# Altium PCB Charger.PcbDoc
Units mil, origin at the board's own origin, x right, y up, seen from the top; angles counter-clockwise.
Board outline 3709 x 2654 mil, 4 copper layers (Top Layer, Internal Plane 1, Internal Plane 2, Bottom Layer), stack 30.634 mil thick; 90 components, 52 nets, 266 pads, 126 vias.
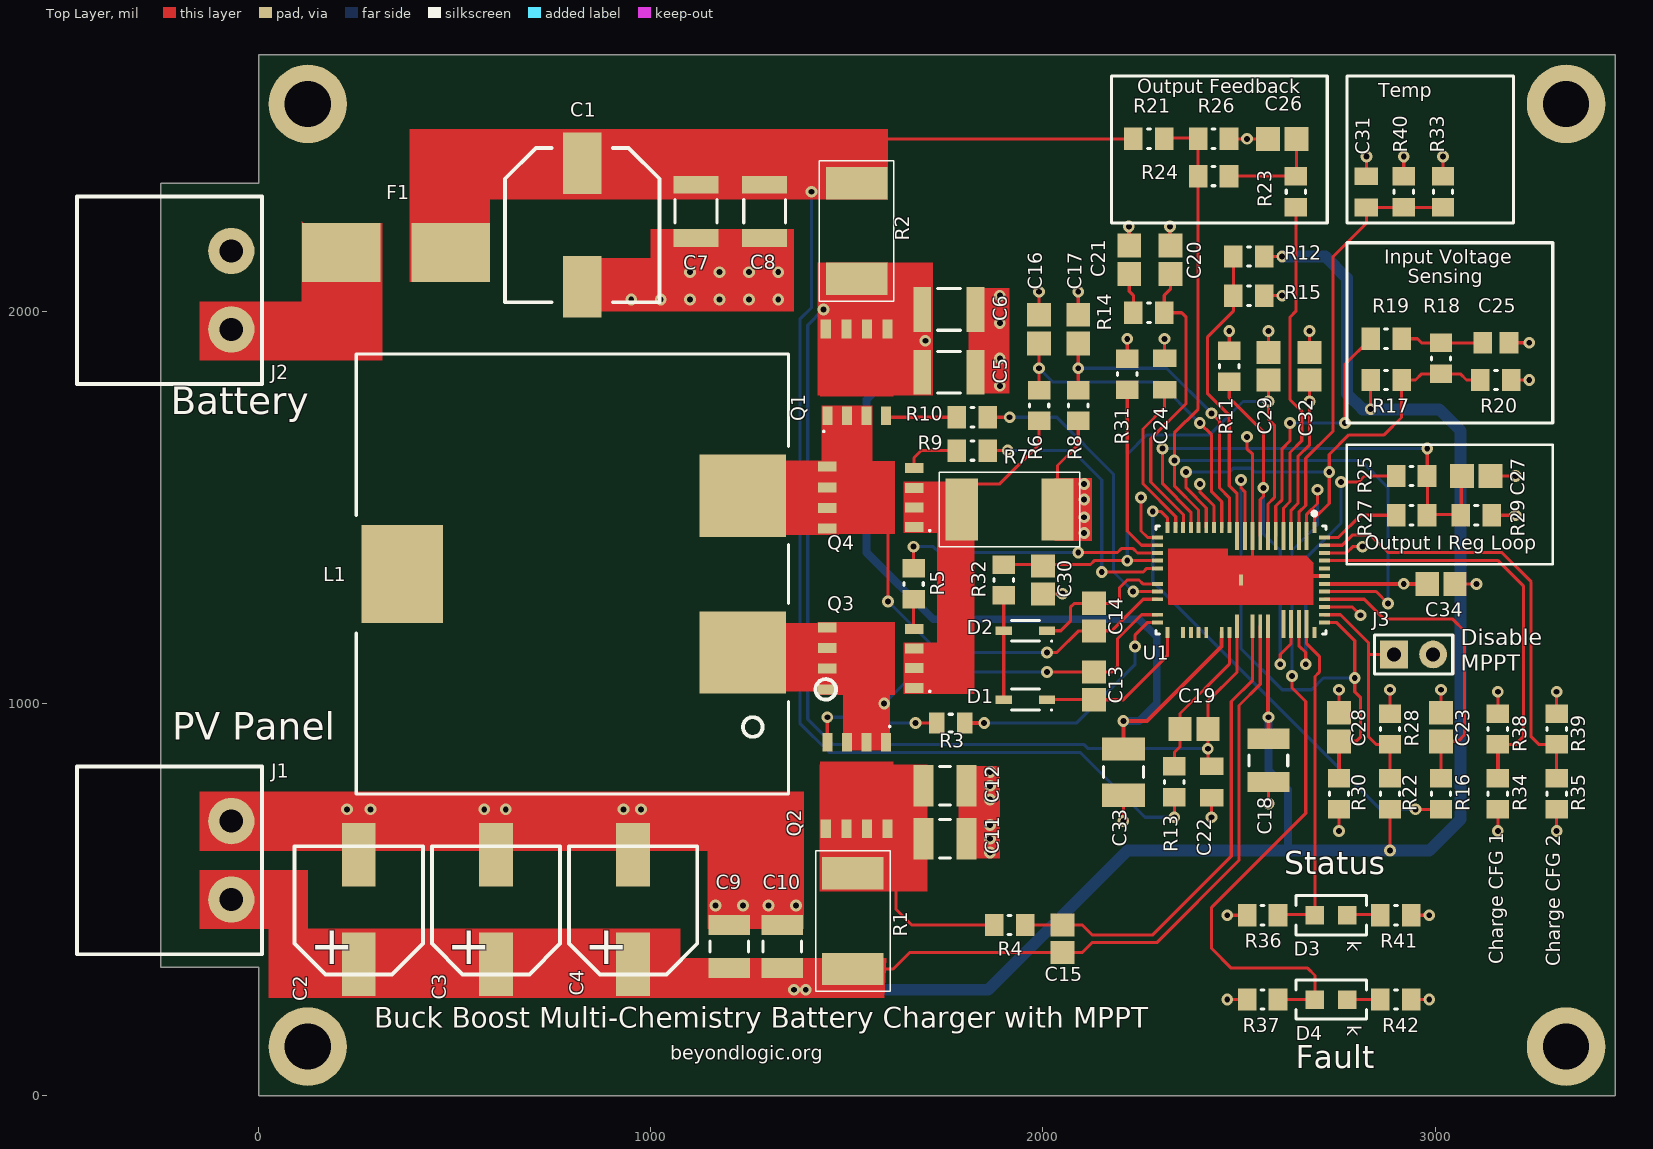
[diagram p0: Top Layer view]
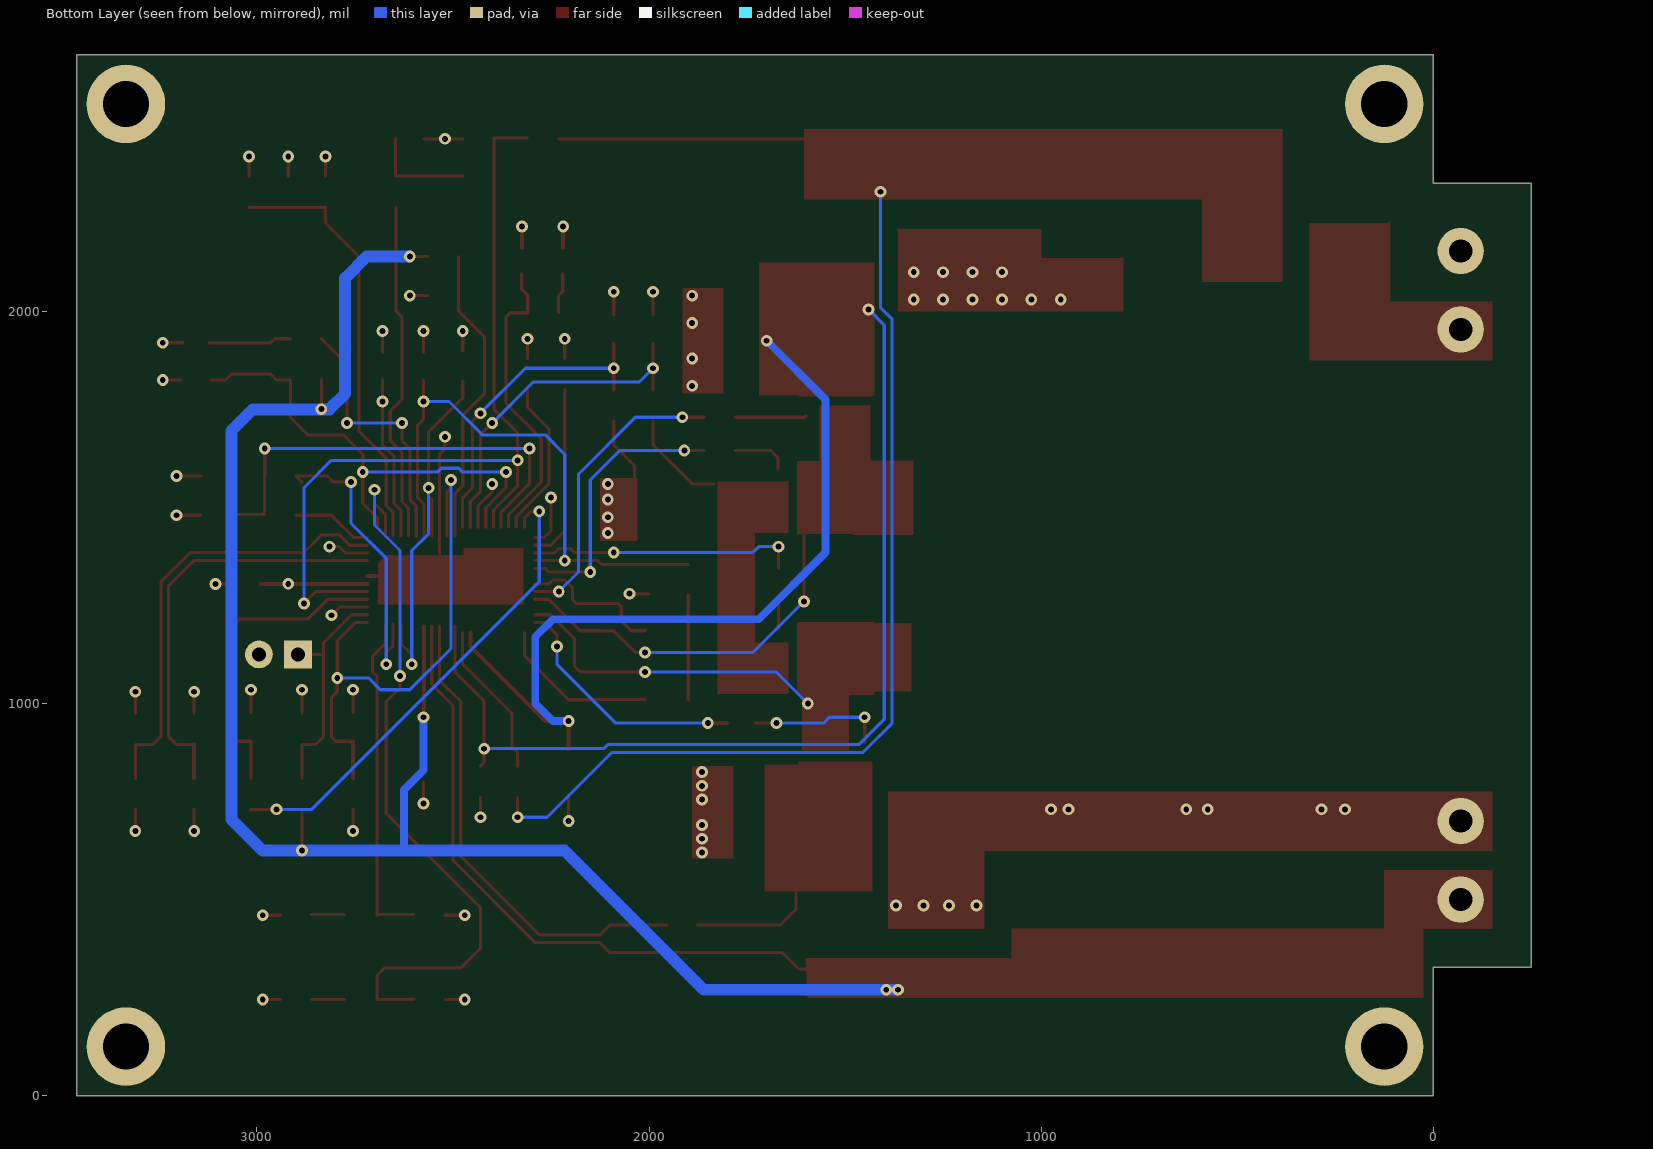
[diagram p1: Bottom Layer view, seen from below]
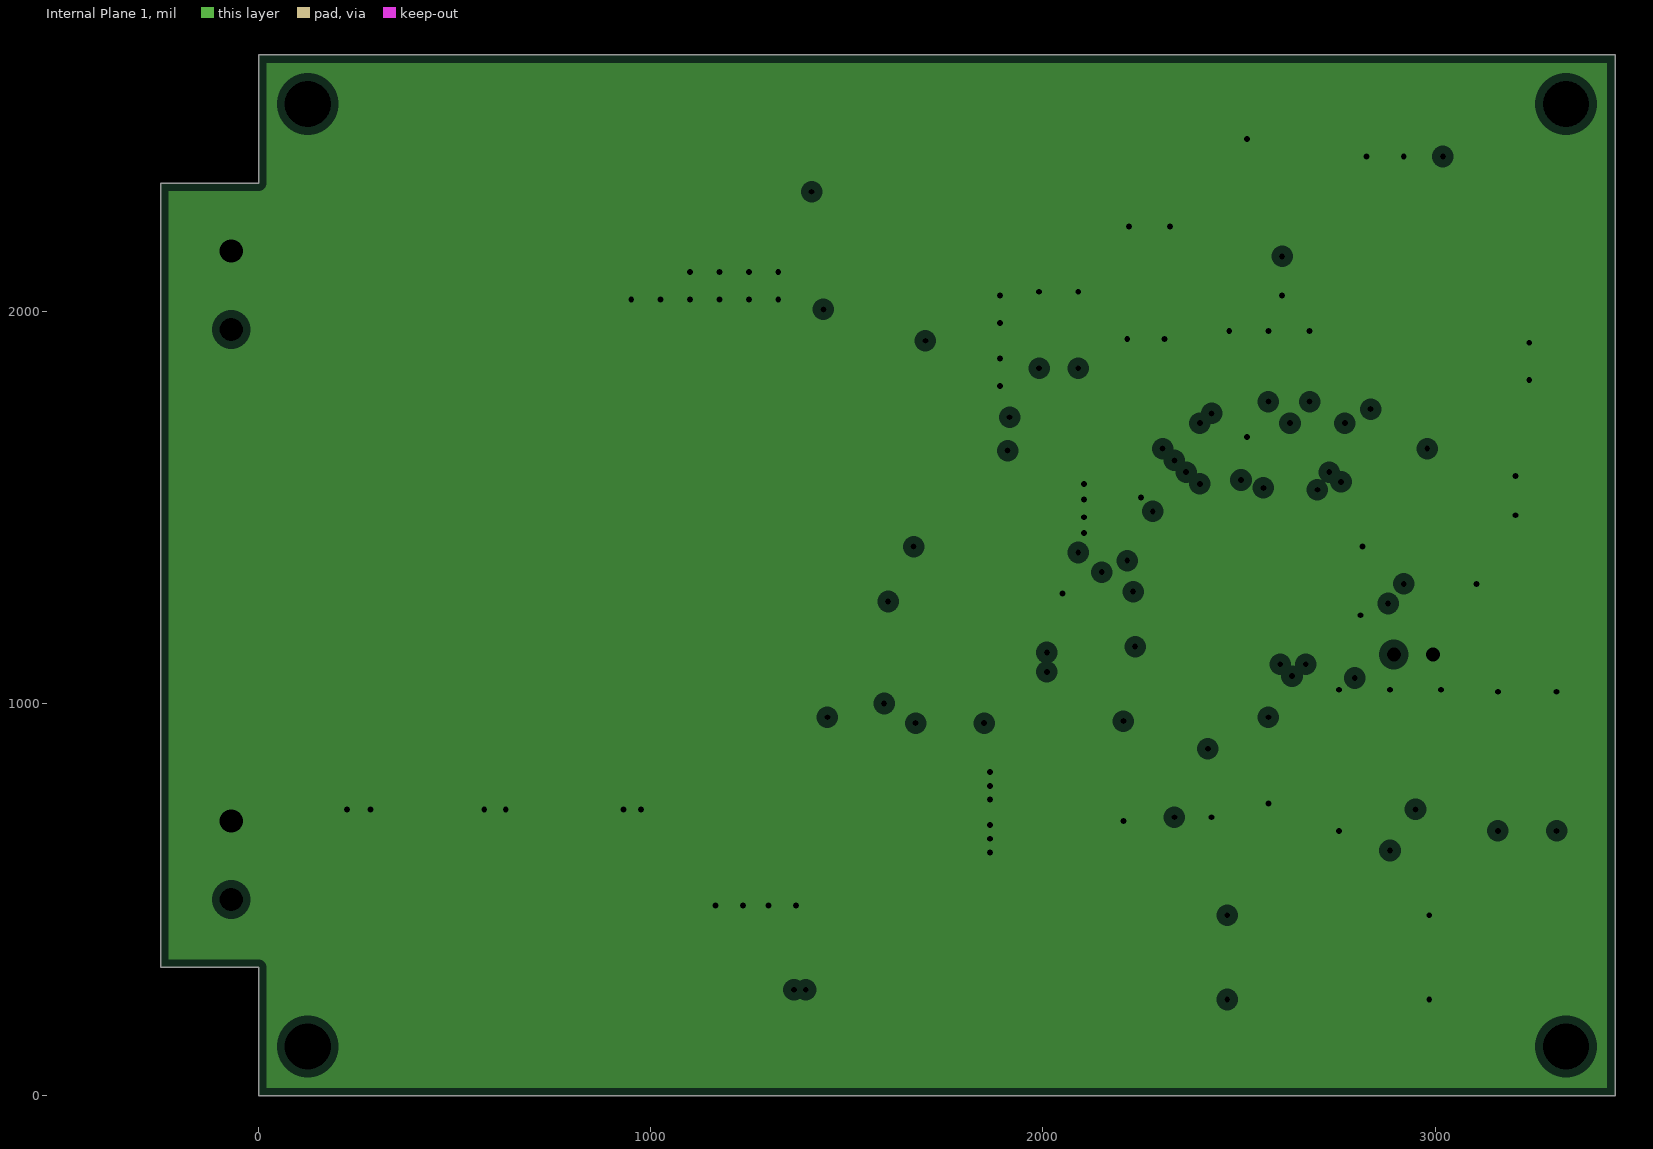
[diagram p2: Internal Plane 1, clearances drawn from the general rule]
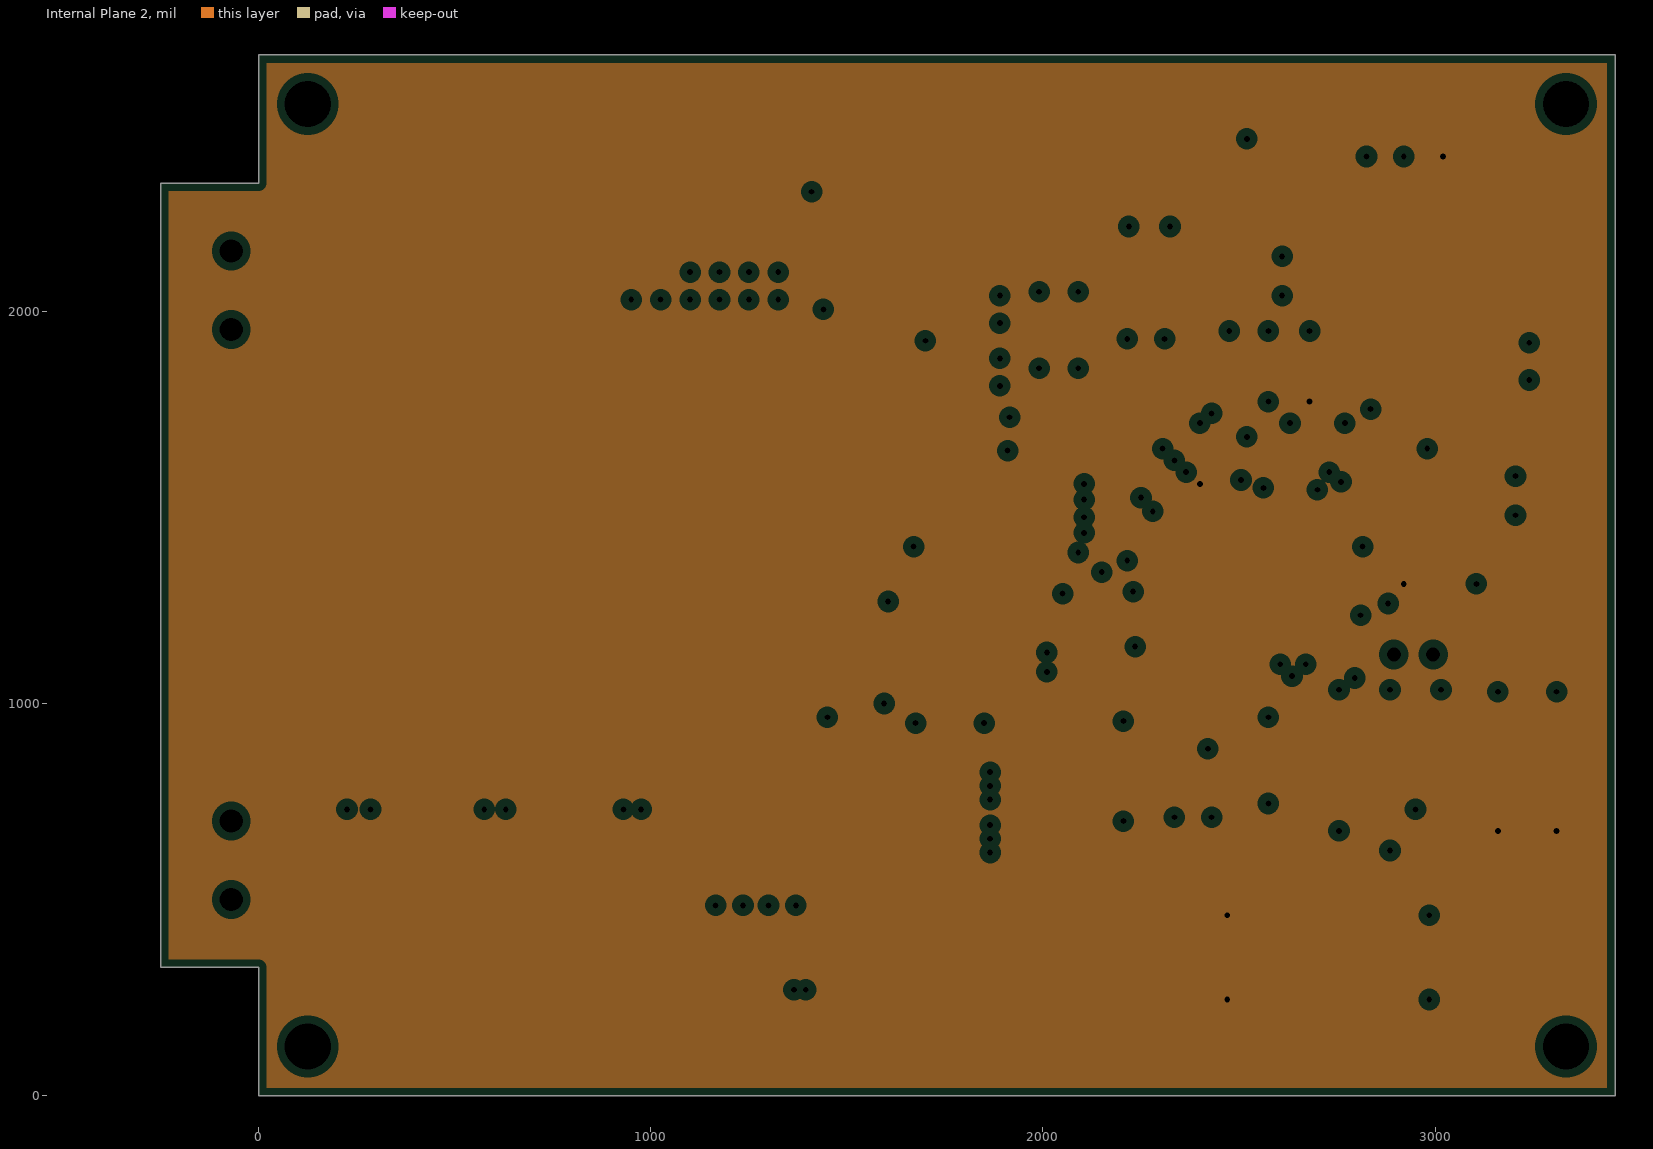
[diagram p3: Internal Plane 2, clearances drawn from the general rule]

## Layer stack, top to bottom
Top Solder: solder mask 0.4, Solder Resist, Dk 3.5
Top Layer: signal copper 1.4
Dielectric 1: core 10, FR-4, Dk 4.2
Internal Plane 1: plane copper 1.417, net GND
Dielectric 3: prepreg 5, Dk 4.2
Internal Plane 2: plane copper 1.417, net 3V3
Dielectric 2: core 10, Dk 4.2
Bottom Layer: signal copper 1.4
Bottom Solder: solder mask 0.4, Solder Resist, Dk 3.5

## Board outline
-250,327 -250,2327 0,2327 0,2654 3459,2654 3459,0 0,0 0,327

## Design rules (kind name [scope] priority, off if disabled: settings)
AssemblyTestPointUsage AssemblyTestPointUsage_1 [All] p2:
AssemblyTestpoint AssemblyTestpoint_1 [All] p2: testpointundercomponent=TRUE minsize=40 maxsize=100 preferedsize=60 minholesize=0 maxholesize=40 preferedholesize=32 testpointgrid=1 usegrid=TRUE gridtolerance=0.01 allowsidetop=TRUE allowsidebottom=TRUE
Clearance [All] p1: gap=10 ignorepadtopadclearanceinfootprint=FALSE except(0: Arc-Hole Track-Hole SMDPad-Hole THPad-Hole Via-Hole Fill-Hole Poly-Hole Region-Hole Text-Hole)
Clearance Clearance_1 [All] p2: gap=8 ignorepadtopadclearanceinfootprint=FALSE except(0: Arc-Hole Track-Hole SMDPad-Hole THPad-Hole Via-Hole Fill-Hole Poly-Hole Region-Hole Text-Hole; 5: SMDPad-SMDPad)
ComponentClearance ComponentClearance_1 [All] p2: gap=10 collisioncheckmode=3 verticalgap=10 showdistances=FALSE
DiffPairsRouting DiffPairsRouting_1 [All] p2: maxlimit=10 minlimit=10 mostfreqgap=10 toplayer_minwidth=15 toplayer_maxwidth=15 toplayer_prefwidth=15 bottomlayer_minwidth=15 bottomlayer_maxwidth=15 bottomlayer_prefwidth=15 maxuncoupledlength=500
FabricationTestPointUsage FabricationTestPointUsage_1 [All] p2: valid=0 allowmultiple=FALSE
FabricationTestpoint FabricationTestpoint_1 [All] p2: side=3 testpointundercomponent=TRUE minsize=40 maxsize=100 preferedsize=60 minholesize=0 maxholesize=40 preferedholesize=32 testpointgrid=1 allowsidetop=TRUE allowsidebottom=TRUE usegrid=TRUE gridtolerance=0.01
FanoutControl Fanout_LCC [IsLCC] p1: bgadir=Out bgaviamode=Centered fanoutstyle=Auto fanoutdirection=Alternating viagrid=1 // Fanout_LCC (Default Rule)
FanoutControl Fanout_BGA [IsBGA] p2: bgadir=Out bgaviamode=Centered fanoutstyle=Auto fanoutdirection=Alternating viagrid=1 // Fanout_BGA (Default Rule)
FanoutControl Fanout_Default [All] p4: bgadir=Out bgaviamode=Centered fanoutstyle=Auto fanoutdirection=Alternating viagrid=1 // Fanout_Default (Default Rule)
FanoutControl Fanout_Small [(CompPinCount < 5)] p5: bgadir=Out bgaviamode=Centered fanoutstyle=Auto fanoutdirection=OutThenIn viagrid=1 // Fanout_Small (Default Rule)
FanoutControl Fanout_BGA_1 [IsBGA] p6: bgadir=Out bgaviamode=Centered fanoutstyle=Auto fanoutdirection=Alternating viagrid=1 // Fanout_BGA (Default Rule)
FanoutControl Fanout_LCC_1 [IsLCC] p7: bgadir=Out bgaviamode=Centered fanoutstyle=Auto fanoutdirection=Alternating viagrid=1 // Fanout_LCC (Default Rule)
FanoutControl Fanout_SOIC_1 [IsSOIC] p8: bgadir=Out bgaviamode=Centered fanoutstyle=Auto fanoutdirection=Alternating viagrid=1 // Fanout_SOIC (Default Rule)
FanoutControl Fanout_Small_1 [(CompPinCount < 5)] p9: bgadir=Out bgaviamode=Centered fanoutstyle=Auto fanoutdirection=OutThenIn viagrid=1 // Fanout_Small (Default Rule)
FanoutControl Fanout_Default_1 [All] p10: bgadir=Out bgaviamode=Centered fanoutstyle=Auto fanoutdirection=Alternating viagrid=1 // Fanout_Default (Default Rule)
Height Height_1 [All] p2: minheight=0 maxheight=1000 prefheight=500
HoleSize HoleSize_1 [All] p2: absolutevalues=TRUE maxlimit=200 minlimit=11.8 maxpercent=80.000 minpercent=20.000
HoleToHoleClearance HoleToHoleClearance_1 [All] p2: gap=10 allowstackedmicrovias=TRUE
LayerPairs LayerPairs_1 [All] p2: enforce=TRUE
MinimumSolderMaskSliver MinimumSolderMaskSliver_1 [All] p2: minsoldermaskwidth=10
NetAntennae NetAntennae_1 [All] p2: netantennaetolerance=0
PasteMaskExpansion PasteMaskExpansion_1 [All] p2: expansion=0
PlaneClearance [All] p1: clearance=20
PlaneClearance PlaneClearance_1 [All] p2: clearance=20
PlaneConnect [All] p1: planeconnectstyle=Relief reliefexpansion=20 reliefentries=4 reliefconductorwidth=10 reliefairgap=10
PlaneConnect PlaneConnect_1 [All] p2: planeconnectstyle=Direct reliefexpansion=20 reliefentries=4 reliefconductorwidth=10 reliefairgap=10
PolygonConnect [All] p1: connectstyle=Relief reliefconductorwidth=10 reliefentries=4 polygonreliefangle="90 Angle" airgapwidth=10
PolygonConnect PolygonConnect_1 [All] p2: connectstyle=Relief reliefconductorwidth=10 reliefentries=4 polygonreliefangle="90 Angle" airgapwidth=10
RoutingCorners RoutingCorners_1 [All] p2: cornerstyle=45-Degree minsetback=100 maxsetback=100
RoutingLayers RoutingLayers_1 [All] p2: top layer_v5=TRUE bottom layer_v5=TRUE
RoutingPriority RoutingPriority_1 [All] p2: routingpriority=0
RoutingTopology RoutingTopology_1 [All] p2: topology=Shortest
RoutingVias [All] p1: holewidth=28 width=50 viastyle="Through Hole" minholewidth=28 minwidth=50 maxholewidth=28 maxwidth=50
RoutingVias RoutingVias_1 [All] p2: holewidth=15 width=30 viastyle="Through Hole" minholewidth=15 minwidth=30 maxholewidth=28 maxwidth=50
ShortCircuit ShortCircuit_1 [All] p2: allowed=FALSE
SilkToBoardRegionClearance SilkToBoardRegionClearance_1 [All] p2:
SilkToSilkClearance SilkToSilkClearance_1 [All] p2: silktosilkclearance=10
SilkToSolderMaskClearance SilkToSolderMaskClearance_1 [IsPad] p2: minsilkscreentomaskgap=10 clearancetoexposedcopper=TRUE
SolderMaskExpansion [All] p1: expansion=4 istentingtop=FALSE
SolderMaskExpansion SolderMaskExpansion_1 [All] p2: expansion=4 istentingtop=FALSE
UnRoutedNet UnRoutedNet_1 [All] p2:
UnpouredPolygon UnpouredPolygon_1 [All] p2:
Width [All] p1: maxlimit=10 minlimit=10 preferedwidth=10
Width Width_1 [All] p2: maxlimit=1000 minlimit=8 preferedwidth=10 minimp=50.000000 maximp=50.000000 favimp=50.000000
24 further rules are at their usual default settings.

## Components (designator, comment, footprint, x,y, rotation, side; value= is the part's Value field where it differs from the comment)
C1 "150uF" PCB-h7n8m0mive84y4pjomrj-1 825,2220 r180 top
C2 "33uF" PCB-9g04u1co75526zy4kkrl-1 255,335 r0 top
C3 "33uF" PCB-9g04u1co75526zy4kkrl-1 605,335 r0 top
C4 "33uF" PCB-9g04u1co75526zy4kkrl-1 955,335 r0 top
C5 "10uF" PCB-41pvis4jpu9wge287x0a-1 1760,1845 r180 top
C6 "10uF" PCB-41pvis4jpu9wge287x0a-1 1760,2005 r180 top
C7 "10uF" PCB-41pvis4jpu9wge287x0a-1 1115,2255 r90 top
C8 "10uF" PCB-41pvis4jpu9wge287x0a-1 1290,2255 r90 top
C9 "2.2uF" CAPC3225X279X50NL20T25 1200,380 r270 top
C10 "2.2uF" CAPC3225X279X50NL20T25 1335,380 r270 top
C11 "2.2uF" CAPC3225X279X50NL20T25 1750,655 r180 top
C12 "2.2uF" CAPC3225X279X50NL20T25 1750,790 r180 top
C13 "220nF" CAPC2013X140X50ML20T25#1 2130,1045 r90 top
C14 "220nF" CAPC2013X140X50ML20T25#1 2130,1220 r270 top
C15 "470nF" CAPC2013X140X50ML20T25#1 2050,400 r90 top
C16 "3.3nF" CAPC2013X94X50ML20T25 1990,1955 r270 top
C17 "3.3nF" CAPC2013X94X50ML20T25 2090,1955 r270 top
C18 "2.2uF" CAPC3225X279X50NL20T25 2575,855 r90 top
C19 "470nF" CAPC2013X140X50ML20T25#1 2385,935 r180 top
C20 "220pF" CAPC2013X94X50ML20T25 2325,2131.42 r270 top
C21 "8.2nF" CAPC2013X94X50ML20T25 2220,2131.42 r270 top
C22 "100nF" CAPC2013X140X50ML20T25#2 2430,800 r90 top
C23 "68nF" CAPC2013X94X50ML20T25 3015,940 r270 top
C24 "100nF" CAPC2013X140X50ML20T25#2 2310,1840 r270 top
C25 "820nF" CAPC2013X95X45NL10T25 3155,1920 r180 top
C26 "82nF" CAPC2013X94X50ML20T25 2610,2440 r0 top
C27 "10nF" CAPC2013X94X50ML20T25 3105,1580 r180 top
C28 "10nF" CAPC2013X94X50ML20T25 2755,940 r270 top
C29 "4.7uF" CAPC2013X140X50ML20T25#1 2575,1860 r270 top
C30 "4.7uF" CAPC2013X140X50ML20T25#1 2000,1315 r90 top
C31 "100nF" CAPC2013X140X50ML20T25#2 2825,2305 r270 top
C32 "4.7uF" CAPC2013X140X50ML20T25#1 2680,1860 r270 top
C33 "1uF" CAPC3225X279X50ML20T25 2205,825 r90 top
C34 "1uF" CAPC2013X140X50ML20T25#1 3015.43,1305 r180 top
D1 "1N4148WS" FSC-1N4148WS-SOD-323-2 1955,1010 r180 top
D2 "1N4148WS" FSC-1N4148WS-SOD-323-2 1955,1185.43 r180 top
D3 "Lite-On LTST-C170KRKT" PCB-5ta9mte2am12bu12jwvi-1 2735,460 r180 top
D4 "Lite-On LTST-C170KRKT" PCB-5ta9mte2am12bu12jwvi-1 2735,245 r180 top
F1 "10A" PCB-nlucop3bvobg45y57dd7-1 350,2150 r180 top
J1 "Input" PCB-aknpg75yzj2hq04tmkjt-1 -70,600 r270 top locked
J2 "Battery" PCB-aknpg75yzj2hq04tmkjt-1 -70,2054 r270 top locked
J3 "Molex 90120-0762" PCB-zbro1p3mqdrs1lkjydms-1 2945,1125 r0 top
L1 "15uH" "WE-HCF 2818" 665,1330 r180 top
Q1 "BSC059N04LS G" INF-PG-TDSON-8-1_V 1525,1845 r0 top
Q2 "BSC028N06NS" INF-PG-TDSON-8-1_V 1525,790 r180 top
Q3 "BSC028N06NS" INF-PG-TDSON-8-1_V 1560,1115 r90 top
Q4 "BSC059N04LS G" INF-PG-TDSON-8-1_V 1560,1525 r90 top
R1 "0.007" Resistor 1515,445 r90 top
R2 "0.01" Resistor 1525,2205 r90 top
R3 "2" RESC2013X60X35NL10T20 1765,950 r180 top
R4 "10" RESC2013X60X35ML10T20 1915,435 r180 top
R5 "2" RESC2013X60X35ML10T20 1670,1305 r270 top
R6 "10" RESC2013X60X35ML10T20 1990,1760 r90 top
R7 "0.006" Resistor 1915,1495 r180 top
R8 "10" RESC2013X60X35ML10T20 2090,1760 r90 top
R9 "2" RESC2013X60X35ML10T20 1820,1645 r180 top
R10 "2" RESC2013X60X35ML10T20 1820,1730 r180 top
R11 "200k" RESC2013X60X35ML10T20 2475,1860 r270 top
R12 "110k" RESC2013X60X35ML10T20 2525,2140 r0 top
R13 "10" RESC2013X60X35ML10T20 2335,800 r270 top
R14 "10k" RESC2013X60X35ML10T20 2270,1996.42 r0 top
R15 "35k7" RESC2013X60X35ML10T20 2525,2040 r180 top
R16 "53k6" RESC2013X60X35ML10T20 3015,770 r90 top
R17 "93k1" RESC2013X60X35ML10T20 2875,1825 r180 top
R18 "5k49" RESC2013X60X35ML10T20 3015,1880 r90 top
R19 "1k05" RESC2013X60X35ML10T20 2875,1930 r180 top
R20 "3k24" RESC2013X60X35ML10T20 3155,1825 r180 top
R21 "442k" RESC2013X60X35ML10T20 2270,2440 r180 top
R22 "196k" RESC2013X60X35ML10T20 2885,770 r270 top
R23 "24k3" RESC2013X60X35ML10T20 2645,2305 r90 top
R24 "102k" RESC2013X60X35ML10T20 2435,2345 r180 top
R25 "40k2" RESC2013X60X35ML10T20 2940,1580 r0 top
R26 "18k7" RESC2013X60X35ML10T20 2435,2440 r180 top
R27 "3k01" RESC2013X60X35ML10T20 2940,1480 r0 top
R28 "8k06" RESC2013X60X35ML10T20 2885,935 r270 top
R29 "60k4" RESC2013X60X35ML10T20 3105,1480 r180 top
R30 "21k" RESC2013X60X35ML10T20 2755,770 r90 top
R31 "215k" RESC2013X60X35ML10T20 2215,1840 r270 top
R32 "4.02" RESC2013X60X35ML10T20 1900,1315 r270 top
R33 "11k5" RESC2013X60X35ML10T20 3020,2305 r90 top
R34 "DNF" RESC2013X60X35ML10T20 3160,770 r270 top
R35 "DNF" RESC2013X60X35ML10T20 3310,770 r270 top
R36 "1k37" RESC2013X60X35ML10T20 2560,460 r180 top
R37 "3k32" RESC2013X60X35ML10T20 2560,245 r180 top
R38 "0" RESC2013X60X35ML10T20 3160,935 r270 top
R39 "0" RESC2013X60X35ML10T20 3310,935 r270 top
R40 "10k" RESC2013X60X35ML10T20 2920,2305 r270 top
R41 "549" RESC2013X60X35ML10T20 2900,460 r180 top
R42 "549" RESC2013X60X35ML10T20 2900,245 r180 top
U1 "LT8490EUKJ#PBF" LT-UKJ64(58)_V 2505,1315 r180 top

## Footprints (in the part's own frame and the unit in brackets; to place one, negate y for a bottom-side part, rotate by r counter-clockwise, add the part's x,y. Pads: shape width x height; smd on the part's side, far side on the other; paste and mask are expansions set on the pad)
CAPC2013X94X50ML20T25 [mm] "CAPC2013X94X50ML20T25"
  rect 1.55x1.55 smd: 1(-0.925,0) 2(0.925,0)
  body extent -1.1,-0.72 1.11,0.72, height 0.94
CAPC2013X95X45NL10T25 [mm] "CAPC2013X95X45NL10T25"
  rect 1.2x1.4 smd: 1(-0.85,0) 2(0.85,0)
  body extent -1.05,-0.67 1.05,0.67, height 0.95
CAPC2013X140X50ML20T25#1 [mm] "CAPC2013X140X50ML20T25"
  rect 1.5x1.55 smd: 1(-0.9,0) 2(0.9,0)
  body extent -1.1,-0.72 1.1,0.72, height 1.4
CAPC2013X140X50ML20T25#2 [mm] "CAPC2013X140X50ML20T25"
  rect 1.143x1.524 smd: 1(-1.016,0) 2(1.016,0)
  body extent -1.1,-0.72 1.1,0.72, height 1.4
CAPC3225X279X50ML20T25 [mm] "CAPC3225X279X50ML20T25"
  rect 1.5x2.8 smd: 1(-1.5,0) 2(1.5,0)
  silkscreen extent -0.35,-1.3 0.35,1.3, body extent -1.7,-1.35 1.7,1.35, height 2.79
CAPC3225X279X50NL20T25 [mm] "CAPC3225X279X50NL20T25"
  rect 1.3x2.7 smd: 1(-1.4,0) 2(1.4,0)
  silkscreen extent -0.35,-1.25 0.35,1.25, body extent -1.7,-1.35 1.7,1.35, height 2.79
FSC-1N4148WS-SOD-323-2 [mm] "FSC-1N4148WS-SOD-323-2"
  rect 1.05x0.55 smd: 1(-1.4,0) 2(1.4,0)
  silkscreen extent -1.75,-0.67 0.9,0.72, body extent -0.9,-0.67 0.9,0.67, height 1
INF-PG-TDSON-8-1_V [mm] "TDSON, 8-Leads, Body 6.15x5.15mm, Pitch 1.27mm"
  rect 0.65x1.2 smd: 1(-1.905,-2.825) 2(-0.635,-2.825) 3(0.635,-2.825) 4(1.905,-2.825) 5(2.007,2.794) 6(0.66,2.794) 7(-0.66,2.794) 8(-2.007,2.794)
  Top Layer region: 0.315,2.925 1.015,2.925 1.015,3.425 0.315,3.425
  Top Layer region: -1.015,2.925 -0.315,2.925 -0.315,3.425 -1.015,3.425
  Top Layer region: 1.65,2.925 2.35,2.925 2.35,3.425 1.65,3.425
  Top Layer region: -2.35,2.925 -1.65,2.925 -1.65,3.425 -2.35,3.425
  Top Layer region: -2.35,2.925 -2.35,-1.575 2.35,-1.575 2.35,2.925
  silkscreen extent -2.23,-3.94 -2.03,-3.74, body extent -2.58,-3.08 2.58,3.08, height 1
LT-UKJ64(58)_V [mm] "QFN, 58-Leads, Body 7x11mm, Pitch 0.5mm"
  rect 0.25x0.7 smd: 1(-4.75,-3.4) 12(0.75,-3.4) 13(1.25,-3.4) 14(1.75,-3.4) 15(2.25,-3.4) 16(2.75,-3.4) 17(3.25,-3.4) 18(3.75,-3.4) 19(4.25,-3.4) 20(4.75,-3.4) 33(4.75,3.4) 35(3.75,3.4) 36(3.25,3.4) 37(2.75,3.4) 38(2.25,3.4) 40(1.25,3.4) 41(0.75,3.4) 52(-4.75,3.4) 65(0,0)
  rect 0.25x1.8 smd: 2(-4.25,-2.85) 3(-3.75,-2.85) 4(-3.25,-2.85) 5(-2.75,-2.85) 6(-2.25,-2.85) 7(-1.75,-2.85) 8(-1.25,-2.85) 9(-0.75,-2.85) 10(-0.25,-2.85) 11(0.25,-2.85) 48(-2.75,2.85) 49(-3.25,2.85) 50(-3.75,2.85) 51(-4.25,2.85)
  rect 0.7x0.25 smd: 21(5.4,-2.75) 22(5.4,-2.25) 23(5.4,-1.75) 24(5.4,-1.25) 25(5.4,-0.75) 27(5.4,0.25) 28(5.4,0.75) 29(5.4,1.25) 31(5.4,2.25) 32(5.4,2.75) 53(-5.4,2.75) 54(-5.4,2.25) 55(-5.4,1.75) 56(-5.4,1.25) 57(-5.4,0.75) 58(-5.4,0.25) 59(-5.4,-0.25) 60(-5.4,-0.75) 61(-5.4,-1.25) 62(-5.4,-1.75) 63(-5.4,-2.25) 64(-5.4,-2.75)
  rect 0.25x1.5 smd: 42(0.25,3)
  rect 0.25x1.55 smd: 44(-0.75,3) 45(-1.25,3) 46(-1.75,3)
  Top Layer region: -4.69,1.575 4.69,1.575 4.69,-2.025 0.86,-2.025 0.86,-1.575 -4.19,-1.575 -4.69,-1.075
  Top Layer lines w0.01: 4.69,1.575 -4.69,1.575 -4.69,-0.25 -4.69,-1.075 -4.19,-1.575 -3.69,-1.575 -0.75,-1.575 0.86,-1.575 0.86,-2.025 4.69,-2.025 4.69,1.575
  silkscreen extent -5.5,-4.42 5.5,3.5, body extent -5.5,-3.5 5.5,3.5, height 0.8
PCB-5ta9mte2am12bu12jwvi-1 [mm]
  rect 1.2x1.2 smd: 1(-1.05,0) 2(1.05,0)
  silkscreen extent -2.29,-1.27 2.29,1.27, body extent -1,-0.63 1,0.63, height 1.1
PCB-9g04u1co75526zy4kkrl-1 [mm]
  rect 2.2x4.1 smd: 1(0,0) 2(0,7.1)
  silkscreen extent -4.15,-0.66 4.15,7.64, body extent -4.19,-0.76 4.19,7.62, height 10.4
PCB-41pvis4jpu9wge287x0a-1 [mm] "CAPC3225X270X30ML30T"
  rect 1.15x2.9 smd: 1(-1.725,0) 2(1.725,0)
  silkscreen extent -0.75,-1.35 0.75,1.35, body extent -1.75,-1.4 1.75,1.4, height 2.7
PCB-aknpg75yzj2hq04tmkjt-1 [mm]
  round 3 hole 1.5: 1(-2.54,0) 2(2.54,0)
  silkscreen extent -6.08,-10 6.08,2, body extent -6.08,-10.03 6.08,1.97, height 8.6
PCB-h7n8m0mive84y4pjomrj-1 [mm]
  rect 2.5x4 smd: 1(0,-4) 2(0,4)
  silkscreen extent -5,-5 5,5, body extent -5.15,-5.15 5.15,5.15, height 10.3
PCB-nlucop3bvobg45y57dd7-1 [mil]
  rect 200x150 smd: 1(-140,0) 2(140,0)
  body extent -194,-99 193,99, height 150
PCB-zbro1p3mqdrs1lkjydms-1 [mm]
  rect 1.8x1.8 hole 0.9: 1(-1.27,0)
  round 1.8 hole 0.9: 2(1.27,0)
  silkscreen extent -2.54,-1.27 2.54,1.27, body extent -2.54,-1.27 2.54,1.27, height 8.54
RESC2013X60X35ML10T20 [mm] "RESC2013X60X35ML10T20"
  rect 1.2x1.45 smd: 1(-1,0) 2(1,0)
  silkscreen extent -0.1,-0.63 0.1,0.63, body extent -1.05,-0.67 1.05,0.67, height 0.6
RESC2013X60X35NL10T20 [mm] "RESC2013X60X35NL10T20"
  rect 1x1.35 smd: 1(-0.9,0) 2(0.9,0)
  silkscreen extent -0.1,-0.58 0.1,0.58, body extent -1.05,-0.67 1.05,0.67, height 0.6
Resistor [mm]
  rect 2.1x4 smd: 1(-3.1,0) 2(3.1,0)
  silkscreen extent -4.55,-2.41 4.55,2.41, body extent -3.25,-1.75 3.25,1.75, height 0.25
"WE-HCF 2818" [mm] "SMD Inductor, 3-Leads, Body 21,5x28mm (max)"
  rect 5.59x5.33 smd: 1(-14.465,5.075) 2(-14.465,-5.075)
  rect 5.28x6.35 smd: 3(7.61,0)
  silkscreen extent -20.5,-14.25 10.57,14.25, body extent -17.92,-14.25 10.08,14.25, height 18.75

## Part data
C1: library part CMP-38bcf3ec736fe77b-2, "Capacitor Alum Elec, 150uf, 20%, 50v, Capacitor Alum Elec, 150uf, 20%, 50v, Smd, Full Reel"
C2 C3 C4: library part CMP-7693bfcb6deba954-1, "Cap Aluminum Lytic 33uF 63V 20% (8 X 10.2mm) SMD 250mA 2000h 105C Automotive T/R"
C5 C6 C7 C8: library part CMP-bd5774f6f82f6290-1, "1210 10 uF 35 V ±10% Tolerance X7R SMT Multilayer Ceramic Capacitor"
C9 C10 C11 C12 C18: library part CMP-2511202-3, "Cap Ceramic 2.2uF 100V X7R 10% SMD 1210 125C Embossed T/R"
C13 C14: library part CMP-3551434-3, "Multilayer Ceramic Capacitors MLCC - SMD/SMT 50volts .22uF 5% X7R 7inch reel"
C15 C19: library part CMP-3555014-4, "Multilayer Ceramic Capacitors MLCC - SMD/SMT .47uF 50v 20% Tol."
C16 C17: library part CMP-173641-3, "CAP CER 3300PF 50V 5% X7R 0805"
C20: library part CMP-173636-3, "CAP CER 220PF 50V 5% X7R 0805"
C21: library part CMP-173647-3, "CAP CER 8200PF 50V 5% X7R 0805"
C22 C24 C31: library part CMP-54a29ee556ae8b65-2, "Capacitor; Ceramic; Cap 0.1 uF; Tol 5%; Vol-Rtg 50 VDC; SMT; 0805; X7R; Tape & Reel"
C23: library part CMP-174430-3, "CAP CER 0.068UF 50V 5% X7R 0805"
C25: library part CMP-139721-3, "Multilayer Ceramic Capacitors MLCC - SMD/SMT 0.82uF 25Volts X7R 0.1"
C26: library part CMP-174432-3, "CAP CER 0.082UF 50V 5% X7R 0805"
C27: library part CMP-16466678-4, "cap smd 0805"
C28: library part CMP-16466678-5, "CAP CER 10NF 50V 5% X7R 0805"
C29 C30 C32: library part CMP-126761-3, "CAP CER 4.7UF 10V 10% X5R 0805"
C33: library part CMP-127163-3, "CAP CER 1UF 100V 10% X7R 1210"
C34: library part CMP-126978-4, "CAP CER 1UF 25V 10% X5R 0805"
D1 D2: library part CMP-814637-6, "DIODE GEN PURP 75V 150MA SOD323F"
D3 D4: library part CMP-1544870-4, "Red 2 x 1.25 x 1.1 mm 130° Water Clear 54 mcd 2 V LED Surface Mount"
F1: library part CMP-254385-4, "154 Series Fast-Acting 125 V 10 A OMNI-BLOK® Surface Mount Fuse & Holder"
J1 J2: library part CMP-0680cf8a1162d947-2, "Phoenix 1757242 MSTBA 2.5/ 2-G-5.08 Base Strip/Header 4 Kilo-Volt Surge 320 Volt Rated III/2 12 Amp Green Plug-In"
J3: library part CMP-8fae46aeaafe5069-4, "2.54mm (.100\") Pitch C-Grid III? Header, Single Row, Vertical, 1 Circuits, Gold (Au) Plating"
L1: library part CMP-19365683-2, "SMD High Current Inductor WE-HCF, L=15µH"
Q1 Q4: library part CMP-840507-3, "N-Channel OptiMOS 3 Power-Transistor, 40 V VDS, 73 A ID, -55 to 150 degC, PG-TDSON-8-1, Reel, Green"
Q2 Q3: library part CMP-4153327-3, "N-Channel OptiMOS Power-Transistor, 60 V VDS, 100 A ID, -55 to 150 degC, PG-TDSON-8-1, Reel, Green"
R1: library part CMP-3140fbc44d5aee87-2, "Res Metal Alloy 2512 7m Ohm 1% 2W ±75ppm/°C Molded SMD Embossed Carrier T/R"
R2: library part CMP-3ffef57a43e1e039-1, "Res Metal Alloy 2512 10m Ohm 1% 2W ±75ppm/°C Molded SMD Embossed Carrier T/R"
R3 R5 R9 R10: library part CMP-0849c1512bc3d78e-1, "RC Series 0805 0.125 W 2 Ohms 1% ±100 ppm/°C SMT Thick Film Chip Resistor"
R4 R6 R8 R13: library part CMP-0281c9fbc26fdd46-3, "RC Series 0805 0.125 W 10 Ohms 1% ±100 ppm/°C SMT Thick Film Chip Resistor"
R7: library part CMP-23c4e9405fd9fc03-1, "Res Metal Alloy 2512 6m Ohm 1% 3W ±75ppm/°C Molded SMD Embossed Carrier T/R"
R11: library part CMP-e4272f597d573be0-1, "RC Series 0805 0.125 W 200 kOhms 1% ±100 ppm/°C SMT Thick Film Chip Resistor"
R12: library part CMP-38f6f2b2e11ce731-2, "RC Series 0805 0.125 W 110 kOhms 1% ±100 ppm/°C SMT Thick Film Chip Resistor"
R14 R40: library part CMP-1854303-12, "RC Series 0805 0.125 W 10 kOhms 1% ±100 ppm/°C SMT Thick Film Chip Resistor"
R15: library part CMP-1866102-3, "RC Series 0805 0.125 W 35.7 kOhms 1% ±100 ppm/°C SMT Thick Film Chip Resistor"
R16: library part CMP-1854567-3, "RC Series 0805 0.125 W 53.6 kOhms 1% ±100 ppm/°C SMT Thick Film Chip Resistor"
R17: library part CMP-1854487-3, "RC Series 0805 0.125 W 93.1 kOhms 1% ±100 ppm/°C SMT Thick Film Chip Resistor"
R18: library part CMP-1875616-3, "RC Series 0805 0.125 W 5.49 kOhms 1% ±100 ppm/°C SMT Thick Film Chip Resistor"
R19: library part CMP-b5997e3e74036a5e-1, "RC Series 0805 0.125 W 1.05 kOhms 1% ±100 ppm/°C SMT Thick Film Chip Resistor"
R20: library part CMP-1854678-3, "RC Series 0805 0.125 W 3.24 kOhms 1% ±100 ppm/°C SMT Thick Film Chip Resistor"
R21: library part CMP-1875655-3, "RC Series 0805 0.125 W 442 kOhms 1% ±100 ppm/°C SMT Thick Film Chip Resistor"
R22: library part CMP-97215c7414f848e6-2, "RC Series 0805 0.125 W 196 kOhms 1% ±100 ppm/°C SMT Thick Film Chip Resistor"
R23: library part CMP-1854639-3, "RC Series 0805 0.125 W 24.3 kOhms 1% ±100 ppm/°C SMT Thick Film Chip Resistor"
R24: library part CMP-1854533-3, "RC Series 0805 0.125 W 102 kOhms 1% ±100 ppm/°C SMT Thick Film Chip Resistor"
R25: library part CMP-a88663d3e8667741-1, "RC Series 0805 0.125 W 40.2 kOhms 1% ±100 ppm/°C SMT Thick Film Chip Resistor"
R26: library part CMP-c8620311b81c17a5-2, "RC Series 0805 0.125 W 18.7 kOhms 1% ±100 ppm/°C SMT Thick Film Chip Resistor"
R27: library part CMP-7c68b5716a47a3af-1, "RC Series 0805 0.125 W 3.01 kOhms 1% ±100 ppm/°C SMT Thick Film Chip Resistor"
R28: library part CMP-f925303c7afe26e2-2, "RC Series 0805 0.125 W 8.06 kOhms 1% ±100 ppm/°C SMT Thick Film Chip Resistor"
R29: library part CMP-bfd776c8b5e36010-1, "RC Series 0805 0.125 W 60.4 kOhms 1% ±100 ppm/°C SMT Thick Film Chip Resistor"
R30: library part CMP-1875654-3, "RC Series 0805 0.125 W 21 kOhms 1% ±100 ppm/°C SMT Thick Film Chip Resistor"
R31: library part CMP-5dec96b9cda1822b-1, "RC Series 0805 0.125 W 215 kOhms 1% ±100 ppm/°C SMT Thick Film Chip Resistor"
R32: library part CMP-1855242-3, "RC Series 0805 0.125 W 4.02 Ohms 1% ±100 ppm/°C SMT Thick Film Chip Resistor"
R33: library part CMP-8094498c85275f53-2, "RC Series 0805 0.125 W 11.5k Ohm 1% ±100 ppm/°C SMT Thick Film Chip Resistor"
R34 R35: library part CMP-1875921-6, "Res Thick Film 0805 0 Ohm Molded SMD Paper T/R"
R36: library part CMP-1854489-3, "RC Series 0805 0.125 W 1.37 kOhms 1% ±100 ppm/°C SMT Thick Film Chip Resistor"
R37: library part CMP-5d85960ed7bd8242-1, "RC Series 0805 0.125 W 3.32 kOhms 1% ±100 ppm/°C SMT Thick Film Chip Resistor"
R38 R39: library part CMP-1875921-8, "Res Thick Film 0805 0 Ohm Molded SMD Paper T/R"
R41 R42: library part CMP-1854428-5, "RC Series 0805 0.125 W 549 Ohms 1% ±100 ppm/°C SMT Thick Film Chip Resistor"
U1: library part CMP-20381226-2, "High Voltage, High Current Buck-Boost Battery Charge Controller with Maximum Power Point Tracking (MPPT), 6 to 80V, -40 to 125 degC, 58-Pin QFN(UKJ64)"

## Free pads (board coordinates)
  round 200 hole 118: 0(125,125) 0(125,2529) 0(3334,125) 0(3334,2529)

## Via types
v1: diameter 30, hole 15, Top Layer to Bottom Layer, tented both sides, 126 vias

## Nets (pads, with @x,y where several pads share a name; then routed paths per layer and width w, separated by ;. In a path a pad name is that pad's centre, name@x,y a point inside that pad or via, vN(x,y) a via of type N, cw(c..) or ccw(c..) an arc to the next point about the centre after c; other vN are vias at no path point)
3V3: C32.2 C34.2 R33.2 R34.2 R35.2 R36.2 R37.2 U1.4 U1.14 U1.58 | length 1078.6
  Top Layer w8: v1(2400,1560) 2400,1540 2436.1,1503.9 U1.14 ; v1(2470,245) R37.2 ; v1(2470,460) R36.2 ; U1.4 2632.95,1492.95 2650,1510 2650,1630 2680,1660 v1(2680,1770) C32.2 ; R33.2 v1(3020,2395) ; v1(3160,675) R34.2 ; v1(3310,675) R35.2
  Top Layer w10: U1.58 C34.2@2989.84,1305.16 ; C34.2@2979.84,1305.16 C34.2
  other v1: 2920,1305.16
EXTVCC: C5.2 C6.2 C19.1 C22.2 C33.2 Q1.5 Q1.6 Q1.7 Q1.8 R2.1 U1.40 U1.42 | length 4645.4
  Top Layer w8: C22.2 2420.43,849.57 v1(2420.43,884.57) C19.1 2420.43,1005.43 2495.16,1080.16 U1.42
  Top Layer w10: C33.2 v1(2205,955) 2265,955 2455.79,1145.79 U1.40
  Bottom Layer w8: v1(1440,2005) 1400,1965 1400,960 1465,895 2105,895 2115,885 v1@2420,885
  Bottom Layer w20: v1(1700,1925) 1550,1775 1550,1385 1720,1215 2245,1215 2290,1170 2290,1000 2245,955 v1(2205,955)
GND: C1.2 C2.2 C3.2 C4.2 C5.1 C6.1 C7.1 C8.1 C9.1 C10.1 C11.1 C12.1 C16.1 C17.1 C18.1 C20.1 C21.1 C22.1 C23.1 C24.1 C25.1 C26.1 C27.1 C28.1 C29.1 C30.1 C31.1 C32.1 C33.1 C34.1 J1.1 J2.1 J3.2 R7.1 R8.1 R11.1 R15.1 R20.1 R26.1 R28.1 R29.1 R30.1 R31.1 R38.1 R39.1 R40.1 R41.1 R42.1 U1.9 U1.21 U1.55 U1.59 U1.62 U1.65 | length 2798.1
  Top Layer w8: C16.1 v1(1990,2050) ; C30.1 2049.57,1279.57 v1(2050,1280) ; R7.1 2037.05,1607.05 2090,1660 R8.1 ; C17.1 v1(2090,2050) ; v1(2205,700) C33.1 ; R31.1 v1(2215,1930) ; v1(2250,1525) 2250,1440 2266.73,1423.27 U1.21 ; C24.1 v1(2310,1930) ; v1(2430,710) C22.1 ; R26.1 C26.1 ; R11.1 v1(2475,1950) ; v1(2520,1680) 2520,1650 2534.53,1635.47 U1.9 2534.53,1377.01 2534.53,1360.47 2535,1360 ; R15.1 v1(2610,2040) ; v1@2575,740 v1(2575,745) C18.1 ; C29.1 v1(2575,1950) ; C32.1 v1(2680,1950) ; U1.55 2788.9,1246.1 v1(2810,1225) ; U1.62 2773.9,1383.9 2790,1400 v1(2815,1400) ; v1(2755,675) R30.1 ; C28.1 v1(2755,1035) ; C31.1 v1(2825,2395) ; R28.1 v1(2885,1035) ; R40.1 v1(2920,2395) ; R42.1 v1(2985,245) ; R41.1 v1(2985,460) ; C23.1 v1(3015,1035) ; C34.1 v1(3105.43,1305) ; C27.1 v1(3205,1580) ; R29.1 v1(3205,1480) ; R38.1 v1(3160,1030) ; C25.1 v1(3240,1920) ; R20.1 v1(3240,1825) ; R39.1 v1(3310,1030)
  Top Layer w10: C21.1@2218.99,2162.83 v1(2218.99,2216.42) ; C20.1@2323.99,2162.83 v1(2323.99,2216.42) ; U1.65 2514.84,1324.84 2689.65,1324.84 U1.59
  other v1: 1165,485 1235,485 1300,485 1370,485 1865,620 1865,655 1865,690 225,730 285,730 575,730 630,730 930,730 975,730 1865,755 1865,790 1865,825 2105,1435 2105,1475 2105,1520 2105,1560 1890,1810 1890,1880 1890,1970 950,2030 1025,2030 1100,2030 1175,2030 1250,2030 1325,2030 1890,2040 1100,2100 1175,2100 1250,2100 1325,2100 2520,2440
NetC1_1: C1.1 C7.2 C8.2 F1.1 R2.2 R13.2 R21.2 | length 3113.1
  Top Layer w8: 1590,2440 R21.2 ; v1(2335,710) R13.2
  Bottom Layer w8: v1(1410,2305) 1410,2010 1380,1980 1380,950 1455,875 2095,875 2260,710 v1(2335,710)
NetC11_2: C11.2 C12.2 Q2.5 Q2.6 Q2.7 Q2.8 R1.2 R4.2 | length 347.2
  Top Layer w8: 1625,555 1625,475 1665,435 R4.2
NetC13_1: C13.1 D1.1 U1.33 | length 412.6
  Top Layer w8: D1.1 C13.1@2129.57,1010 ; C13.1 2204.57,1009.57 2317.99,1122.99 U1.33
NetC13_2: C13.2 L1.1 Q2.1 Q2.2 Q2.3 Q3.5 Q3.6 Q3.7 Q3.8 U1.31 | length 832.2
  Top Layer w8: v1(2010.12,1080.43) 2175.43,1080.43 2190,1095 2190,1165 2251.42,1226.42 U1.31
  Bottom Layer w8: v1(1595,1000) 1675.43,1080.43 v1(2010.12,1080.43)
NetC14_1: C14.1 D2.1 U1.27 | length 378.1
  Top Layer w8: D2.1 2045.43,1185.43 2070,1210 2070,1245 2080.43,1255.43 C14.1 2185.43,1255.43 2195,1265 2195,1295 2215,1315 2245,1315 2254.84,1305.16 U1.27
NetC14_2: C14.2 L1.2 Q1.1 Q1.2 Q1.3 Q4.5 Q4.6 Q4.7 Q4.8 U1.29 | length 992.5
  Top Layer w8: v1(1605,1260) 1605,1455 ; v1(2010,1130) 2035,1130 2089.57,1184.57 C14.2 2130.87,1185.43 2175.43,1185.43 2255.79,1265.79 U1.29
  Bottom Layer w8: v1(1605,1260) 1735,1130 v1(2010,1130)
NetC15_2: C15.2 R4.1 U1.44 | length 1228.3
  Top Layer w8: R4.1 2100,435 2125,410 2280,410 2480,610 2480,1005 2534.53,1059.53 U1.44
NetC16_2: C16.2 R6.2 U1.13 | length 876.5
  Top Layer w8: R6.2 v1(1990,1855) C16.2 ; v1(2400,1715) 2430,1685 2430,1540 2455.79,1514.21 U1.13
  Bottom Layer w8: v1(1990,1855) 2025,1820 2295,1820 v1(2400,1715)
NetC17_2: C17.2 R8.2 U1.12 | length 816.8
  Top Layer w8: R8.2 v1(2090,1855) C17.2 ; v1(2430,1740) 2450,1720 2450,1550 2475.47,1524.53 U1.12
  Bottom Layer w8: v1(2090,1855) 2315,1855 v1(2430,1740)
NetC19_2: C19.2 R13.1 U1.41 | length 400
  Top Layer w8: R13.1 2335,875 2349.57,889.57 C19.2 2349.57,974.57 2475.47,1100.47 U1.41
NetC20_2: C20.2 R14.2 U1.18 | length 771.6
  Top Layer w8: C20.2 2325,2056.42 2309.37,2040.79 R14.2 2353.58,1996.42 2365,1985 2365,1765 2275,1675 2275,1565 2358.37,1481.63 U1.18@2358.37,1450.58
NetC21_2: C21.2 R14.1 | length 103
  Top Layer w8: C21.2 2220,2051.42 2230.63,2040.79 R14.1
NetC23_2: C23.2 R16.2 U1.56 | length 816.9
  Top Layer w8: U1.56 2819.21,1265.79 2870,1215 3045,1215 3075,1185 3075,920 3058.58,903.58 C23.2 R16.2
NetC24_2: C24.2 U1.19 | length 406.9
  Top Layer w8: C24.2 2310,1755 2255,1700 2255,1560 2338.68,1476.32 U1.19@2338.68,1450.58
NetC25_2: C25.2 R18.2 R19.1 | length 211.8
  Top Layer w8: R19.1 2955,1930 2965.63,1919.37 R18.2 3120.91,1919.37 C25.2
NetC26_2: C26.2 R23.2 R24.1 | length 266.8
  Top Layer w8: R24.1 R23.2@2645,2345 ; R23.2 2646.42,2345.79 C26.2
NetC27_2: C27.2 R25.2 R27.2 R29.2 U1.17 | length 1264.2
  Top Layer w8: v1(2305,1650) 2305,1560 2377.05,1487.95 U1.17 ; v1(2980,1650) 2980,1582.1 2980.38,1581.73 2980.38,1481.73 3066.64,1481.73 3066.64,1578.1 C27.2@3063.01,1581.73
  Bottom Layer w8: v1(2305,1650) 2975,1650 v1@2980,1655
NetC28_2: C28.2 R30.2 U1.10 U1.53 | length 1409.7
  Top Layer w8: v1(2505,1570) 2505,1550 2514.84,1540.16 U1.10 ; U1.53 2748.27,1206.73 2795,1160 2795,1080 ; C28.2 2798.58,903.58 2810,915 2810,1015 2795,1030 v1(2795,1065)
  Top Layer w10: R30.2 C28.2
  Bottom Layer w8: v1(2505,1570) 2505,1140 2610,1035 2685,1035 2715,1065 v1(2795,1065)
NetC29_2: C29.2 C30.2 R32.1 U1.7 U1.24 | length 1493.4
  Top Layer w8: R32.1 1900.2,1354.57 2121.14,1354.57 2130.79,1364.21 v1(2215,1364.21) U1.24 ; U1.7 2573.9,1508.9 2590,1525 2590,1710 2575,1725 v1(2575,1770) C29.2
  Bottom Layer w8: v1(2215,1364.21) 2215,1635 2265,1685 2425,1685 2510,1770 v1(2575,1770)
NetC31_2: C31.2 R33.1 R40.2 U1.3 | length 1104.5
  Top Layer w8: U1.3 2652.64,1487.64 2670,1505 2670,1625 2740,1695 2740,2140 2825,2225 C31.2 3019.37,2265 R33.1
NetD3_1: D3.1 R41.2 | length 84.3
  Top Layer w8: D3.1@2777.34,461.73 R41.2@2861.64,461.73
NetD3_2: D3.2 R36.1 U1.51 | length 854.3
  Top Layer w8: R36.1@2600.38,461.73 D3.2@2693.66,461.73 ; U1.51 2672.32,1152.68 2705,1120 2705,1080 2693.66,1068.66 D3.2@2693.66,461.73 ; D3.2 D3.2@2693.66,461.73
NetD4_1: D4.1 R42.2 | length 84.3
  Top Layer w8: D4.1 R42.2
NetD4_2: D4.2 R37.1 U1.2 | length 1887.8
  Top Layer w8: R37.1 D4.2 2693.66,306.34 2675,325 2480,325 2430,375 2430,480 2670,720 2670,1005 2635,1040 v1(2635,1070) ; U1.2 2672.32,1482.32 2700,1510 v1(2700,1545)
  Bottom Layer w8: v1(2635,1070) 2635,1390 2700,1455 v1(2700,1545)
NetF1_2: F1.2 J2.2
NetJ3_1: J3.1 R22.1 R28.2 U1.54 | length 601.3
  Top Layer w8: U1.54 2758.58,1226.42 2830,1155 2830,1125 ; R22.1 R28.2 2849.37,895.63 2830,915 2830,1125 ; J3.1@2900,1125 2830,1125
NetQ1_4: Q1.4 R10.2 | length 182.2
  Top Layer w8: Q1.4 1603.78,1730 R10.2
NetQ2_4: Q2.4 R3.2 | length 350.7
  Top Layer w8: Q2.4@1449.21,900.43 Q2.4 v1(1450,965) ; v1(1675,950) R3.2
  Bottom Layer w8: v1(1450,965) 1540,965 1555,950 v1(1675,950)
NetQ3_1: Q3.1 Q3.2 Q3.3 Q4.1 Q4.2 Q4.3 R6.1 R7.2 | length 257.1
  Top Layer w8: 1835,1560 1890,1560 1990,1660 R6.1
NetQ3_4: Q3.4 R5.2 | length 81.1
  Top Layer w8: R5.2@1670,1270.63 1670,1191.22 Q3.4
NetQ4_4: Q4.4 R9.2 | length 143.4
  Top Layer w8: Q4.4 1671.22,1626.22 1690,1645 R9.2
NetR3_1: R3.1 U1.32 | length 642.2
  Top Layer w8: v1(2235,1145) 2235,1175 2266.73,1206.73 U1.32
  Top Layer w10: R3.1 v1(1850,950)
  Bottom Layer w8: v1(1850,950) 2085,950 2235,1100 v1(2235,1145)
NetR5_1: R5.1 U1.23 | length 692.4
  Top Layer w8: R5.1@1670,1345 v1(1670,1400) ; v1(2090,1385) 2190,1385 2200,1395 2230,1395 2241.1,1383.9 U1.23
  Bottom Layer w8: v1(1670,1400) 1720,1400 1735,1385 v1(2090,1385)
NetR9_1: R9.1 U1.25 | length 703
  Top Layer w8: R9.1 v1(1910,1645) ; v1(2150,1335) 2255,1335 2264.53,1344.53 U1.25
  Bottom Layer w8: v1(1910,1645) 2075,1645 2150,1570 v1(2150,1335)
NetR10_1: R10.1 U1.28 | length 763.3
  Top Layer w8: R10.1 v1(1915,1730) ; v1(2230,1285.47) U1.28
  Bottom Layer w8: v1(1915,1730) 2035,1730 2180,1585 2180,1335.47 v1(2230,1285.47)
NetR11_2: R11.2 U1.8 U1.49 | length 1014.9
  Top Layer w8: R11.2 2475,1780 2562,1693 v1(2562,1550) 2562,1528 2554.21,1520.21 U1.8 ; v1(2605,1100) 2605,1125 2632.95,1152.95 U1.49
  Bottom Layer w8: v1(2562,1550) 2562,1433 2605,1390 v1(2605,1100)
NetR12_1: R12.1 R15.2 U1.11 | length 771.1
  Top Layer w8: R12.1 R15.2 2485.63,2000.63 2420,1935 2420,1790 2475,1735 2475,1555 2495.16,1534.84 U1.11
NetR16_1: R16.1 U1.20 | length 1224.1
  Top Layer w8: v1(2280,1490) 2300,1490 2317.99,1472.01 U1.20 ; v1(2950,730) 3014.37,730 R16.1
  Bottom Layer w8: v1(2280,1490) 2280,1310 2860,730 v1(2950,730)
NetR17_1: R17.1 R18.1 R20.2 U1.1 U1.15 | length 1270.9
  Top Layer w8: v1(2365,1590) 2365,1550 2416.42,1498.58 U1.15 ; U1.1 2692.01,1472.01 2730,1510 v1(2730,1590) 2730,1635 2780,1685 2870,1685 2914.37,1729.37 R17.1 2950,1825 2965.63,1840.63 R18.1 3064.37,1840.63 3080,1825 R20.2
  Bottom Layer w8: v1(2365,1590) 2475,1590 2485,1600 2530,1600 2540,1590 v1(2730,1590)
NetR19_2: R19.2 U1.6 | length 685.1
  Top Layer w8: U1.6 2593.58,1503.58 2610,1520 2610,1650 2630,1670 v1(2630,1715) ; v1(2770,1715) 2770,1864.37 R19.2
  Bottom Layer w8: v1(2630,1715) v1(2770,1715)
NetR21_1: R21.1 R24.2 R26.2 U1.16 U1.57 | length 2172.1
  Top Layer w8: R21.1@2310.38,2441.73 R26.2@2396.64,2441.73 ; R26.2 R24.2 2395.63,1750.63 2335,1690 v1(2335,1620) 2335,1555 2396.73,1493.27 U1.16 ; U1.57 2849.53,1285.47 v1(2880,1255)
  Bottom Layer w8: v1(2335,1620) 2810,1620 2880,1550 v1(2880,1255)
NetR23_1: R23.1 U1.5 | length 876.4
  Top Layer w8: U1.5 2613.27,1498.27 2630,1515 2630,1640 2660,1670 2660,1745 2630,1775 2630,1985 2645,2000 R23.1
NetR25_1: R25.1 U1.50 | length 780.3
  Top Layer w8: U1.50 2652.64,1147.36 2670,1130 v1(2670,1100) ; v1(2760,1565) 2805,1565 2820,1580 R25.1 R25.1@2885.63,1565
  Bottom Layer w8: v1(2670,1100) 2670,1370 2760,1460 v1(2760,1565)
NetR27_1: R27.1 U1.64 | length 206.5
  Top Layer w8: U1.64 2753.27,1423.27 2810,1480 R27.1
NetR31_2: R31.2 U1.22 | length 453.1
  Top Layer w8: R31.2 2215,1440 2251.42,1403.58 U1.22
NetR34_1: R34.1 R38.2 U1.61 | length 1078.3
  Top Layer w8: U1.61 3160.79,1364.21 3225,1300 3225,915 3205.63,895.63 R38.2
  Top Layer w10: R34.1 R38.2
NetR35_1: R35.1 R39.2 U1.63 | length 1142.3
  Top Layer w8: U1.63 2763.58,1403.58 2790,1430 2835,1430 2880,1385 3170,1385 3245,1310 3245,915 3264.37,895.63 R39.2 R35.1
VGATE: D1.2 D2.2 R32.2 | length 265.7
  Top Layer w10: D1.2 1899.88,1080.43 1900,1080.55 R32.2
VIN: C2.1 C3.1 C4.1 C9.2 C10.2 C15.1 C18.2 J1.2 R1.1 R12.2 R17.2 R22.2 U1.45 U1.46 | length 6275
  Top Layer w8: R1.1 1617.95,322.95 1660,365 2100,365 2125,390 2290,390 2500,600 2500,995 2554.21,1049.21 U1.45 ; R12.2 v1(2610,2140) ; v1(2835.63,1750.63) R17.2 ; v1(2885,625) R22.2
  Top Layer w10: U1.46 2573.9,966.1 v1(2575,965) C18.2
  Bottom Layer w20: v1(2575,965) 2575,830 2625,780 2625,625
  Bottom Layer w30: v1(1365,270) 1860,270 2215,625 2625,625 v1(2885,625) 2985,625 3065,705 3065,1695 3010,1750 2815,1750 2775,1790 2775,2085 2720,2140 v1(2610,2140)
  other v1: 1395,270
pads on no net: L1.3 U1.35 U1.36 U1.37 U1.38 U1.48 U1.52 U1.60

## Polygon pours and split planes (outlines as drawn)
GND on Internal Plane 1 (split plane): 3438.9,20.1 20.1,20.1 20.1,327 19.71,330.92 18.57,334.69 16.71,338.17 14.21,341.21 11.17,343.71 7.69,345.57 3.92,346.71 0,347.1 -229.9,347.1 -229.9,2306.9 0,2306.9 3.92,2307.29 7.69,2308.43 11.17,2310.29 14.21,2312.79 16.71,2315.83 18.57,2319.31 19.71,2323.08 20.1,2327 20.1,2633.9 3438.9,2633.9
3V3 on Internal Plane 2 (split plane): 3438.9,20.1 20.1,20.1 20.1,327 19.71,330.92 18.57,334.69 16.71,338.17 14.21,341.21 11.17,343.71 7.69,345.57 3.92,346.71 0,347.1 -229.9,347.1 -229.9,2306.9 0,2306.9 3.92,2307.29 7.69,2308.43 11.17,2310.29 14.21,2312.79 16.71,2315.83 18.57,2319.31 19.71,2323.08 20.1,2327 20.1,2633.9 3438.9,2633.9

## Other copper
Top Layer:
  rectangle net NetC11_2: 1430,520 1705,845
  rectangle net NetC14_2: 1325,1430 1480,1620
  rectangle net NetC14_2: 1435,1615 1565,1760
  rectangle net NetC13_2: 1330,1030 1500,1205
  rectangle net NetC13_2: 1490,880 1610,1040
  rectangle net GND: 1785,605 1890,840
  rectangle net GND: 1810,1790 1915,2060
  rectangle net EXTVCC: 1425,1785 1720,2125
  rectangle net NetC1_1: 385,2285 1605,2465
  rectangle net NetC1_1: 385,2075 590,2465
  rectangle net GND: 2030,1415 2125,1575
  region net VIN: -150,575 125,575 125,425 1075,425 1075,350 1600,350 1595,250 940,250 280,250 245,250 205,250 150,250 25,250 25,425 -60,425 -150,425
  region net NetQ3_1: 1645,1565 1645,1530 1645,1500 1645,1440 1645,1435 1655,1435 1730,1435 1730,1155 1645,1155 1645,1025 1825,1025 1825,1565 1735,1565
  region net NetF1_2: -150,2025 -150,1875 315,1875 315,2225 115,2225 110,2230 110,2025
  region net GND: 790,2135 1000,2135 1000,2210 1365,2210 1365,2000 790,2000
  region net GND: -150,775 -150,625 1145,625 1145,525 1145,425 1390,425 1390,595 1390,775

## Silkscreen, mask and mechanical layers (free items; w line width, h text height)
Top Overlay:
  lines w7: 2775,1355 2775,1660 3300,1660 3300,1355 2775,1355
  lines w8: 2175,2225 2725,2225 2725,2600 2175,2600 2175,2225 ; 2775,1715 3300,1715 3300,2175 2775,2175 2775,1715 ; 2775,2225 3200,2225 3200,2600 2775,2600 2775,2225
  text "Output Feedback" at 2240,2545 h60
  text "Temp" at 2855,2535 h60
  text "Input Voltage" at 2870,2110 h60
  text "Sensing" at 2930,2060 h60
  text "Battery" at -225,1715 h120
  text "Output I Reg Loop" at 2820,1380 h60
  text "Disable" at 3065,1135 h70
  text "MPPT" at 3065,1070 h70
  text "PV Panel" at -220,885 h120
  text "Status" at 2615,545 h100
  text "Charge CFG 1" at 3185,335 h60 r90
  text "Charge CFG 2" at 3330,330 h60 r90
  text "Buck Boost Multi-Chemistry Battery Charger with MPPT" at 295,155 h90
  text "beyondlogic.org" at 1050,80 h60
  text "Fault" at 2645,50 h100
Outline:
  the board outline again, w8

## Text inside footprints (layer, text, board x,y; h text height)
C2: Top Overlay "+" at 130,335 h98.43
C3: Top Overlay "+" at 480,335 h98.43
C4: Top Overlay "+" at 830,335 h98.43
D3: Top Overlay "k" at 2765,395 h60 r270
D4: Top Overlay "k" at 2765,180 h60 r270